# Altium PCB E-19 RGB 8x8 Display.PcbDoc
Units mil, origin at the board's own origin, x right, y up, seen from the top; angles counter-clockwise.
Board outline 1549 x 1635.81 mil, 2 copper layers (Top Layer, Bottom Layer); 28 components, 45 nets, 142 pads, 52 vias.
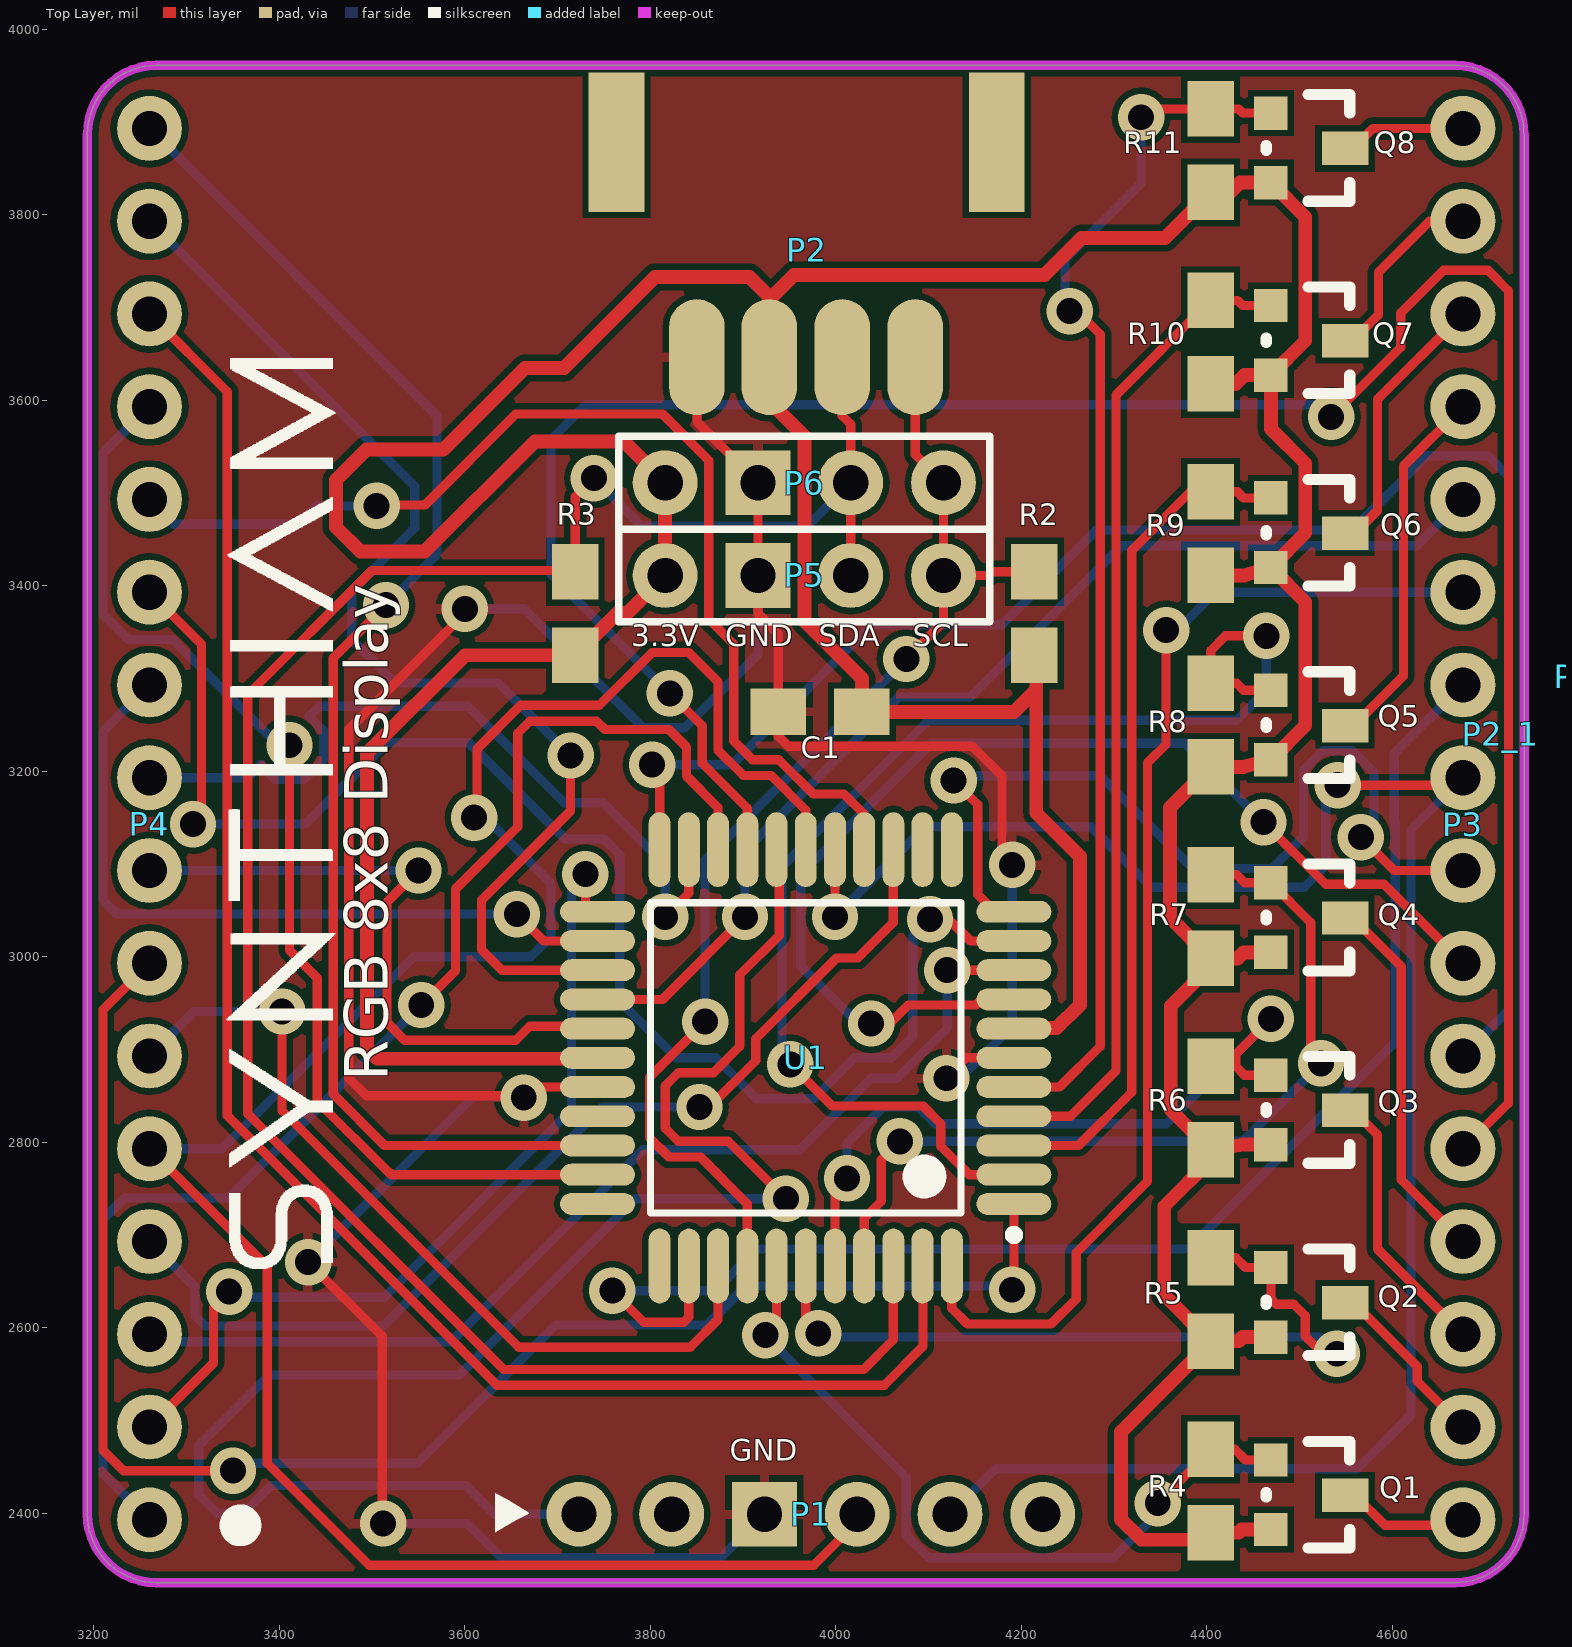
[diagram p0: Top Layer view]
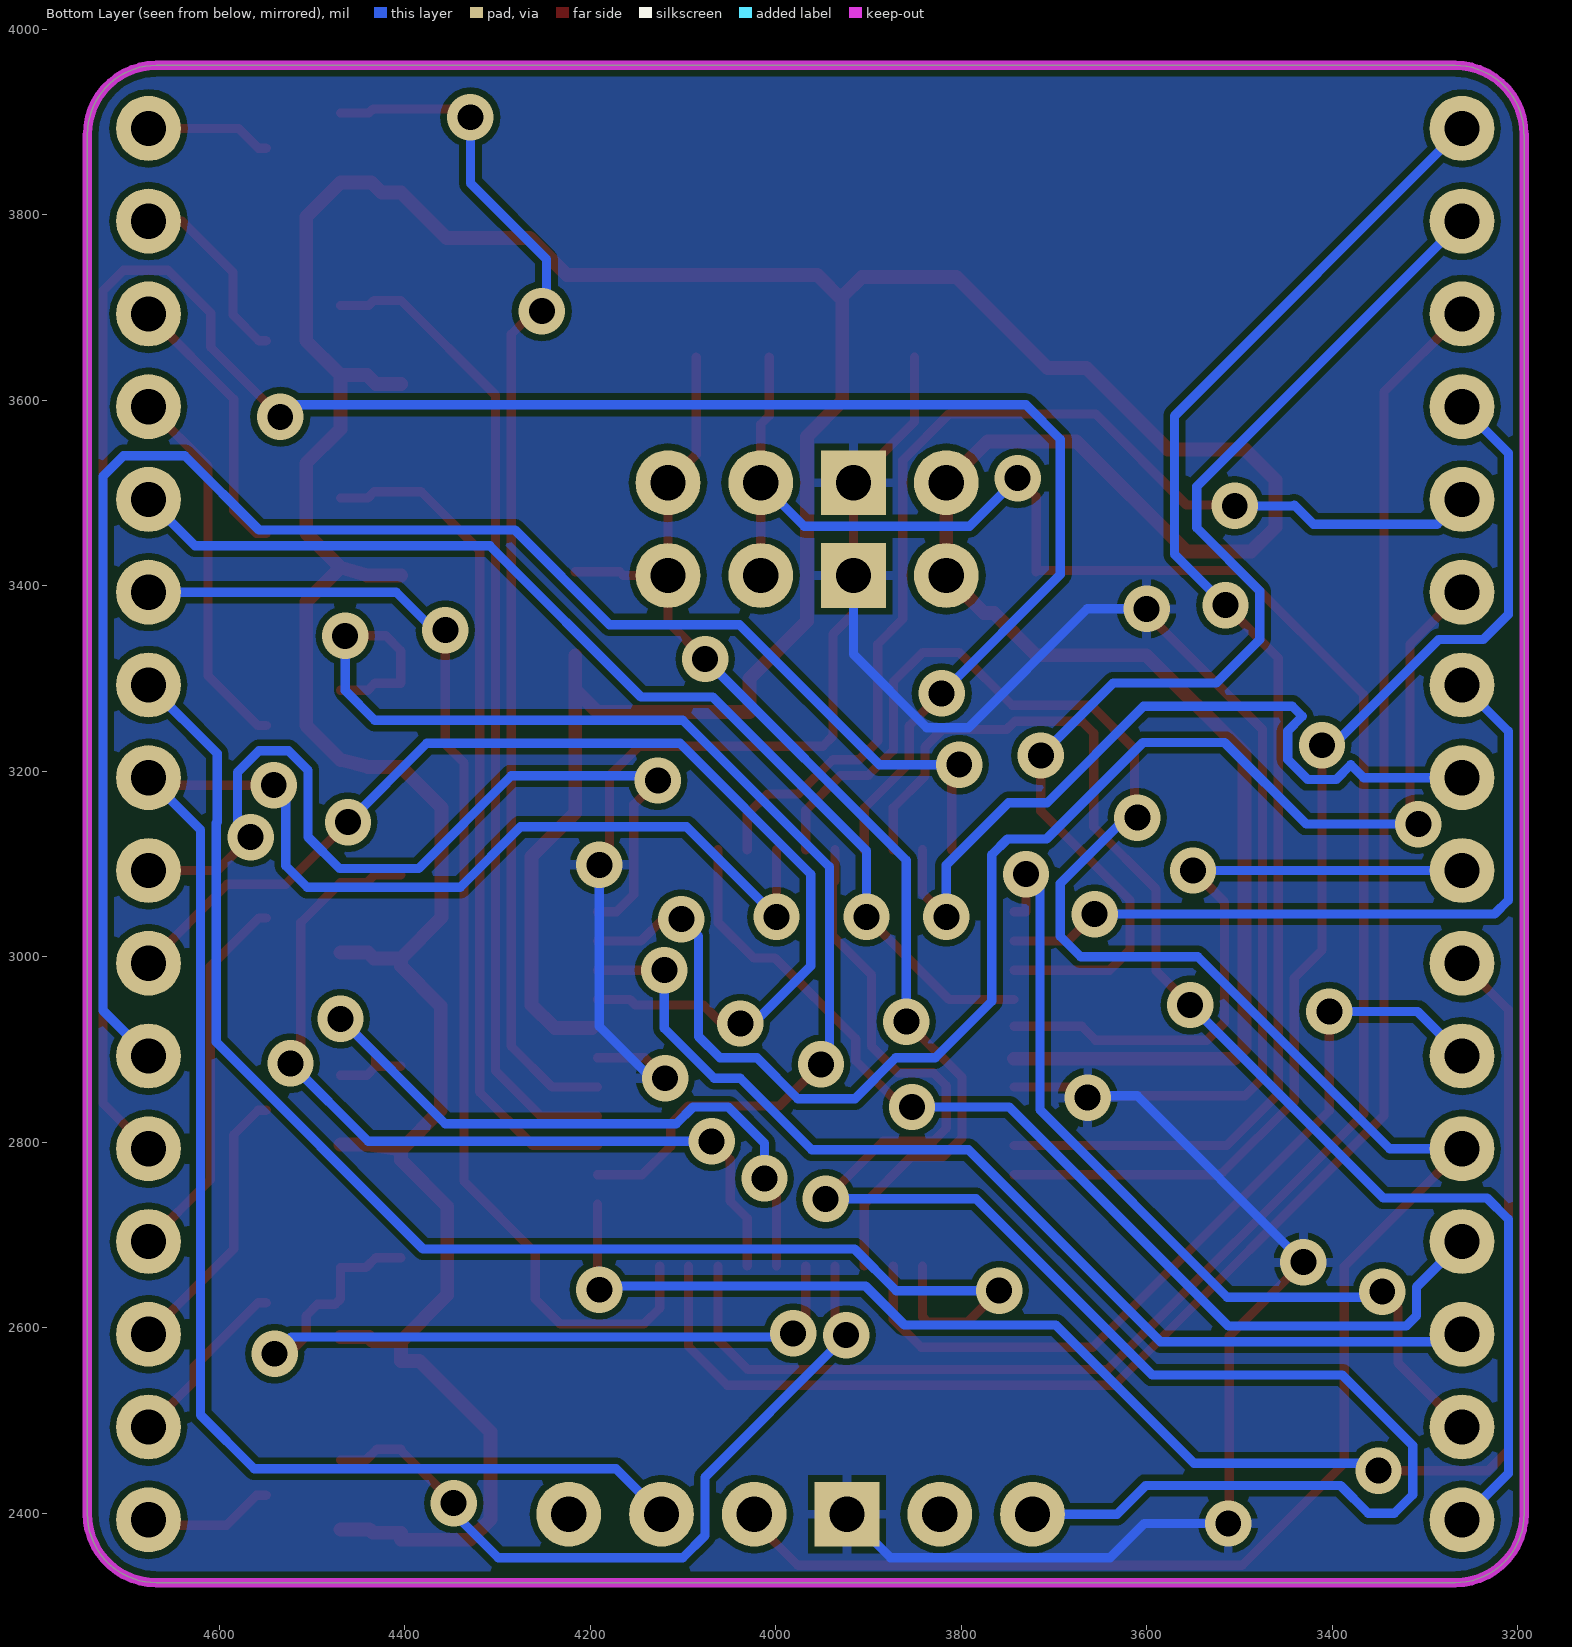
[diagram p1: Bottom Layer view, seen from below]

## Layer stack, top to bottom
Top Layer: signal copper 1.4
Dielectric: dielectric 12.6, FR-4, Dk 4.8
Bottom Layer: signal copper 1.4

## Board outline
3193,2399.5 ccw(c3267.31,2399.5) 3267.31,2325.19 4667.69,2325.19 ccw(c4667.69,2399.5) 4742,2399.5 4742,3886.69 4741.81,3886.69 ccw(c4667.5,3886.69) 4667.5,3961 3267.5,3961 ccw(c3267.5,3886.69) 3193.19,3886.69 3193,3886.69

## Design rules (kind name [scope] priority, off if disabled: settings)
Clearance [All] p1: gap=7
PolygonConnect [All] p1: connectstyle=Relief reliefconductorwidth=10 reliefentries=4 polygonreliefangle="90 Angle"
RoutingVias [All] p1: holewidth=28 width=50 viastyle="Through Hole" minholewidth=28 minwidth=50 maxholewidth=28 maxwidth=50
SilkscreenOverComponentPads [All] p1: minsilkscreentomaskgap=10
SolderMaskExpansion [All] p1: expansion=4
Width Width_1 [InNet('VCC')] p1: maxlimit=20 minlimit=10 preferedwidth=15 minimp=50.000000 maximp=50.000000 favimp=50.000000
Width [All] p2: maxlimit=10 minlimit=10 preferedwidth=10
27 further rules are at their usual default settings.

## Components (designator, comment, footprint, x,y, rotation, side; value= is the part's Value field where it differs from the comment)
C1 "Cap" "0805 TIGHT" 3983,3264 r180 top (schematic designator C3)
P1 "PROG" HDR1X6 3723,2399 r0 top
P2 "I2C" "JST-PH 4-pin SMD" 3967.5,3648 r180 top
P2_1 "Header 4" HDR1X4#1 4717,3240.5 r180 top (schematic designator P2)
P2_2 "Header 4" HDR1X4#1 4815.77,3302.36 r180 top (schematic designator P2)
P3 "Header 16" HDR1X16 4676,2393 r90 top
P4 "Header 16" HDR1X16 3260,2393 r90 top
P5 "Header 4" HDR1X4#2 4116,3411 r180 top
P6 "Header 4" HDR1X4#2 4116,3511 r180 top
Q1 "MOSFET-P" "SOT-23 P-FET" 4509,2420 r270 top
Q2 "MOSFET-P" "SOT-23 P-FET" 4509,2627.43 r270 top
Q3 "MOSFET-P" "SOT-23 P-FET" 4509,2834.86 r270 top
Q4 "MOSFET-P" "SOT-23 P-FET" 4509,3042.28 r270 top
Q5 "MOSFET-P" "SOT-23 P-FET" 4509,3249.71 r270 top
Q6 "MOSFET-P" "SOT-23 P-FET" 4509,3457.14 r270 top
Q7 "MOSFET-P" "SOT-23 P-FET" 4509,3664.57 r270 top
Q8 "AO3415" "SOT-23 P-FET" 4509,3872 r270 top
R2 "Res1" "0805 TIGHT" 4214,3370 r90 top
R3 "Res1" "0805 TIGHT" 3719,3370 r90 top
R4 "Res1" "0805 TIGHT" 4404,2424 r270 top
R5 "Res1" "0805 TIGHT" 4404,2630.43 r270 top
R6 "Res1" "0805 TIGHT" 4404,2836.86 r270 top
R7 "Res1" "0805 TIGHT" 4404,3043.29 r270 top
R8 "Res1" "0805 TIGHT" 4404,3249.71 r270 top
R9 "Res1" "0805 TIGHT" 4404,3456.14 r270 top
R10 "Res1" "0805 TIGHT" 4404,3662.57 r270 top
R11 "Res1" "0805 TIGHT" 4404,3869 r270 top
U1 "PIC16F1937 - Matrix" TQFP-PT44_M 3967.5,2891 r180 top

## Footprints (in the part's own frame and the unit in brackets; to place one, negate y for a bottom-side part, rotate by r counter-clockwise, add the part's x,y. Pads: shape width x height; smd on the part's side, far side on the other; paste and mask are expansions set on the pad)
"0805 TIGHT" [mil]
  rect 60x50 smd: 1(-45,0) 2(45,0)
HDR1X4#1 [mil] "Connector; Header; 4 Position"
HDR1X4#2 [mil] "Connector; Header; 4 Position"
  round 70 hole 38: 1(0,0) 2(100,0) 4(300,0)
  rect 70x70 hole 38: 3(200,0)
  silkscreen extent -50,-50 350,50
HDR1X6 [mil] "Connector; Header; 6 Position"
  round 70 hole 38: 1(0,0) 2(100,0) 4(300,0) 5(400,0) 6(500,0)
  rect 70x70 hole 38: 3(200,0)
HDR1X16 [mil] "Connector; Header; 16 Position"
  round 70 hole 38: 1(0,0) 2(100,0) 3(200,0) 4(300,0) 5(400,0) 6(500,0) 7(600,0) 8(700,0) 9(800,0) 10(900,0) 11(1000,0) 12(1100,0) 13(1200,0) 14(1300,0) 15(1400,0) 16(1500,0)
"JST-PH 4-pin SMD" [mil]
  rect 60x150 smd: 0(-206,-230) 0(204,-230)
  oval 60x125 smd: 1(-118.11,1.64) 2(-39.37,1.64) 3(39.37,1.64) 4(117.32,1.64)
"SOT-23 P-FET" [mil]
  rect 36x50 smd: 1(0.5,40)
  rect 36x36 smd: 2(-37.5,-40) 3(37.5,-40)
  silkscreen extent -58,-45 58,45
TQFP-PT44_M [mm] "Thin QFP, 44-Leads, Body 10x10mm, Pitch 0.8mm, IPC Low Density"
  oval 2.05x0.6 smd: 1(-5.7,4) 2(-5.7,3.2) 3(-5.7,2.4) 4(-5.7,1.6) 5(-5.7,0.8) 6(-5.7,0) 7(-5.7,-0.8) 8(-5.7,-1.6) 9(-5.7,-2.4) 10(-5.7,-3.2) 11(-5.7,-4) 23(5.7,-4) 24(5.7,-3.2) 25(5.7,-2.4) 26(5.7,-1.6) 27(5.7,-0.8) 28(5.7,0) 29(5.7,0.8) 30(5.7,1.6) 31(5.7,2.4) 32(5.7,3.2) 33(5.7,4)
  oval 0.6x2.05 smd: 12(-4,-5.7) 13(-3.2,-5.7) 14(-2.4,-5.7) 15(-1.6,-5.7) 16(-0.8,-5.7) 17(0,-5.7) 18(0.8,-5.7) 19(1.6,-5.7) 20(2.4,-5.7) 21(3.2,-5.7) 22(4,-5.7) 34(4,5.7) 35(3.2,5.7) 36(2.4,5.7) 37(1.6,5.7) 38(0.8,5.7) 39(0,5.7) 40(-0.8,5.7) 41(-1.6,5.7) 42(-2.4,5.7) 43(-3.2,5.7) 44(-4,5.7)
  silkscreen extent -5.82,-4.25 4.25,4.97, body extent -5,-5 5,5, height 1.2

## Part data
C1: "Capacitor"
P1: library part "Header 6", "Header, 6-Pin"
P2: library part "Header 4", "Header, 4-Pin"
P2_1 P2_2 P5 P6: "Header, 4-Pin"
P3 P4: "Header, 16-Pin"
Q1 Q2 Q3 Q4 Q5 Q6 Q7: "P-Channel MOSFET"
Q8: library part MOSFET-P, "P-Channel MOSFET"
R2 R3 R4 R5 R6 R7 R8 R9 R10 R11: "Resistor"

## Via types
v1: diameter 50, hole 28, Top Layer to Bottom Layer, tented both sides, 52 vias

## Nets (pads, with @x,y where several pads share a name; then routed paths per layer and width w, separated by ;. In a path a pad name is that pad's centre, name@x,y a point inside that pad or via, vN(x,y) a via of type N, cw(c..) or ccw(c..) an arc to the next point about the centre after c; other vN are vias at no path point)
17: P3.16 Q8.1 | length 135.9
  Top Layer w10: Q8.1 4557.5,3871.5 4579,3893 P3.16
18: P3.15 Q7.1 | length 207.4
  Top Layer w10: Q7.1 4557.07,3664.07 4585,3692 4585,3738 4640,3793 P3.15
19: P3.14 Q6.1 | length 295.2
  Top Layer w10: Q6.1 4559.64,3456.64 4584,3481 4584,3601 P3.14
20: P3.13 Q5.1 | length 401.8
  Top Layer w10: Q5.1 4558.21,3249.21 4612,3303 4612,3529 P3.13
29: P3.4 Q4.1 | length 406.2
  Top Layer w10: Q4.1 4557.22,3041.78 4609.54,2989.46 4609.54,2759.46 P3.4
30: P3.3 Q3.1 | length 299
  Top Layer w10: Q3.1 4557.64,2834.36 4584,2808 4584,2685 P3.3
31: P3.2 Q2.1 | length 191.8
  Top Layer w10: Q2.1 4558.07,2626.93 4626.8,2558.2 4626.8,2542.2 P3.2
32: P3.1 Q1.1 | length 142.9
  Top Layer w10: Q1.1 4559.5,2419.5 4592,2387 4670,2387 P3.1
A0: P3.5 U1.19 | length 2624.4
  Top Layer w10: v1(3821,3284) 3856,3249 3856,3208.49 3904.51,3159.99 U1.19 ; v1(4534,3582) 4609,3657 4609,3694 4655,3740 4703,3740 4725,3718 4725,2842 P3.5
  Bottom Layer w10: v1(3821,3284) 3693,3412 3693,3558 3730,3595 4521,3595 v1(4534,3582)
A1: P4.1 U1.20 | length 1443.1
  Top Layer w10: v1(3553,2948) 3590,2985 3590,3073 3657,3140 3657,3241 3670,3254 3742,3254 3751,3245 3820,3245 3839,3226 3839,3194.78 3873.01,3160.77 U1.20
  Bottom Layer w10: P4.1 3210,2443 3210,2717 3233,2740 3345,2740 v1(3553,2948)
A2: P4.9 U1.21 | length 860.5
  Top Layer w10: v1(3816,3043) 3841.52,3068.52 U1.21
  Bottom Layer w10: P4.9 3365.95,3193 3379.81,3206.86 3395.67,3191 3426.33,3191 3448,3212.67 3448,3243.33 3432.14,3259.19 3442.95,3270 3603.29,3270 3707.29,3166 3749,3166 3816,3099 v1(3816,3043)
A3: P3.6 U1.22 | length 1810.3
  Top Layer w10: v1(3802,3207) 3810.02,3198.98 U1.22
  Bottom Layer w10: v1(3802,3207) 3887.93,3207 4038.93,3358 4179,3358 4281,3460 4557,3460 4637,3540 4703,3540 4725,3518 4725,2942 P3.6
A4: P4.2 U1.23 | length 952.9
  Top Layer w10: P4.2 3329,2562 3329,2622 v1(3346,2639) ; v1(3730,3089) 3730,3048.48 U1.23
  Bottom Layer w10: v1(3346,2639) 3352,2633 3513,2633 3715,2835 3715,3078 3726,3089 v1(3730,3089)
A5: P4.10 U1.24 | length 804
  Top Layer w10: v1(3655.98,3046) 3685,3016.98 U1.24
  Bottom Layer w10: P4.10 3210,3243 3210,3061 3225,3046 v1(3655.98,3046)
A6: P4.16 U1.31 | length 1523.9
  Top Layer w10: v1(3515,3379) 3457.99,3321.99 3457.99,2852.01 3513.49,2796.51 U1.31
  Bottom Layer w10: P4.16 3570,3583 3570,3434 v1(3515,3379)
B0: P3.7 U1.8 | length 1241.7
  Top Layer w10: v1(4038,2928) 4058,2928 4078,2948 4151.01,2948 4157,2953.99 U1.8 ; v1(4461,3145) 4528,3078 4591,3078 P3.7
  Bottom Layer w10: v1(4038,2928) 4031,2921 3962,2990 3962,3089 4103,3230 4376,3230 v1(4461,3145)
B1: P4.3 U1.9 | length 1137.7
  Top Layer w10: v1(4120,2985.49) U1.9
  Bottom Layer w10: P4.3 3268,2585 3585,2585 3792,2792 3961,2792 4038,2869 4066,2869 4120,2923 v1(4120,2985.49)
B2: P4.11 U1.10 | length 1603.1
  Top Layer w10: P4.11 3316,3337 3316,3152 v1(3307,3143) ; v1(4101.5,3040.5) 4121.5,3040.5 4145.02,3016.98 U1.10
  Bottom Layer w10: v1(3307,3143) 3428,3143 3516,3231 3604,3231 3708,3127 3750,3127 3767,3110 3767,2952 3828,2891 3870.5,2891 3914.5,2847 3976,2847 4020,2891 4060,2891 4083,2914 4083,3022 v1(4101.5,3040.5)
B3: P3.8 U1.11 | length 982.7
  Top Layer w10: v1(4127,3190) 4153,3164 4153,3067 4171.52,3048.48 U1.11 ; v1(4566,3129) 4602,3093 P3.8
  Bottom Layer w10: v1(4127,3190) 4132,3195 4285,3195 4385,3095 4470,3095 4504,3129 4504,3201 4525,3222 4557,3222 4580,3199 4580,3145 4565,3130 v1(4566,3129)
B4: P4.4 U1.14 | length 1130.2
  Top Layer w10: v1(3853,2838) 3863.5,2838 3913.5,2888 3913.5,2911.5 4000.56,2998.56 4023.56,2998.56 4061.99,3036.99 U1.14
  Bottom Layer w10: P4.4 3309,2644 3309,2613 3320,2602 3512,2602 3748,2838 v1(3853,2838)
B5: P4.12 U1.15 | length 1219.4
  Top Layer w10: v1@3505,3487 3557,3487 3655,3585 3800,3585 ; 3790,3585 3813,3585 3863,3535 3863,3364 3890,3337 3890,3232.5 3910.01,3212.49 3938.51,3212.49 3975.49,3175.51 4008.49,3175.51 4030.49,3153.51 U1.15
  Bottom Layer w10: P4.12 3286.79,3466.21 3420.21,3466.21 3441,3487 3442,3486 v1(3505,3486)
C0: P4.13 U1.32 | length 1235.2
  Top Layer w10: v1(3411,3228) 3411,3007 3440.99,2977.01 3440.99,2844.34 3518.33,2767 3518.96,2767 3520.94,2765.02 U1.32
  Bottom Layer w10: P4.13 3210,3543 3210,3369 3237,3342 3285,3342 3399,3228 v1(3411,3228)
C1: P3.10 U1.35 | length 1525
  Top Layer w10: v1(3759,2640) 3793,2606 3836,2606 3841.52,2611.52 U1.35
  Bottom Layer w10: v1(3759,2640) 3870,2640 3915,2685 4380,2685 4603,2908 4603,3144.33 4602,3145.33 4602,3219 P3.10
C2: P4.6 U1.36 | length 915.5
  Top Layer w10: v1(3403,2941) 3403,2834 3658,2579 3746,2579 3843,2579 3873.01,2609.01 U1.36
  Bottom Layer w10: P4.6 3308,2941 v1(3403,2941)
C5: P4.14 U1.43 | length 1873.5
  Top Layer w10: P4.14 3344,3609 3344,2828.75 3634.75,2538 3722.75,2538 4052,2538 4094,2580 U1.43@4094,2666.59
C6: P3.11 U1.44 | length 1296
  Top Layer w10: U1.44 4124.98,2621.02 4142,2604 4232,2604 4259,2631 4259,2681 4336,2758 4336,3209.08 4356,3229.08 v1(4356,3352)
  Bottom Layer w10: v1(4356,3352) 4368,3352 4409,3393 P3.11
C7: P4.7 U1.1 | length 1737.3
  Top Layer w10: P4.7 3210,2943 3210,2468 3232,2446 v1(3350,2446) ; v1(4190,2641) 4192,2643 4192,2733.52 U1.1
  Bottom Layer w10: v1(3350,2446) 3358,2454 3549,2454 3698,2603 3861,2603 3903,2645 4174,2645 4190,2661 v1(4190,2641)
D0: Q1.2 R4.1 U1.38 | length 841.5
  Top Layer w10: v1(3924,2592) 3928,2588 3930,2588 3936,2594 U1.38 ; v1(4347,2411) 4404,2468 R4.1 4430,2469 4441.5,2457.5 Q1.2
  Bottom Layer w10: v1(3924,2592) 3928,2588 3928,2586 3923,2581 3934,2581 4076,2439 4076,2376 4100,2352 4299,2352 4347,2400 v1(4347,2411)
D1: Q2.2 R5.1 U1.39 | length 860.4
  Top Layer w10: U1.39 3967.5,2607.5 v1(3981,2594) ; R5.1 4431,2675.43 4441.5,2664.93 Q2.2 4469,2631 4474.75,2625.25 4493.75,2625.25 4506,2613 4506,2591 4525,2572 v1(4540,2572)
  Bottom Layer w10: v1@3981,2580 3991,2590 4522,2590 v1(4540,2572)
D2: Q3.2 R6.1 U1.40 | length 801
  Top Layer w10: U1.40 3999,2748 v1(4012,2761) ; R6.1 4431,2881.86 ; Q3.2 4440.5,2872.36 4431,2881.86 ; v1(4469,2933) 4431,2895 4431,2881.86
  Bottom Layer w10: v1(4012,2761) 4012,2799 4051,2838 4089,2838 4107,2820 4356,2820 v1(4469,2933)
D3: Q4.2 R7.1 U1.41 | length 924.8
  Top Layer w10: U1.41 4030.49,2718 4049,2736.51 4049,2781 v1(4069,2801) ; R7.1 4432,3088.29 4440.5,3079.78 Q4.2 4512,3036.78 4512,2896 v1(4523,2885)
  Bottom Layer w10: v1(4069,2801) 4439,2801 v1(4523,2885)
D4: Q5.2 R8.1 U1.2 | length 1350.7
  Top Layer w10: v1(3951,2884) 3996,2839 4094,2839 4113.17,2819.83 4113.17,2795.83 4143.98,2765.02 U1.2 ; v1(4464,3346) 4420,3346 4404,3330 R8.1 4432,3294.71 4439.5,3287.21 Q5.2
  Bottom Layer w10: v1(3951,2884) 3942,2893 3942,3097 4100,3255 4432,3255 4464,3287 v1(4464,3346)
D5: Q6.2 R9.1 U1.3 | length 913.7
  Top Layer w10: U1.3 4261.51,2796.51 4319,2854 4319,3438 4382.14,3501.14 R9.1 4433,3501.14 4439.5,3494.64 Q6.2
D6: Q7.2 R10.1 U1.4 | length 1070.5
  Top Layer w10: U1.4 4253.01,2828.01 4302,2877 4302,3605.57 R10.1 4433,3707.57 4438.5,3702.07 Q7.2
D7: Q8.2 R11.1 U1.5 | length 1326
  Top Layer w10: U1.5 4241,2859.5 4285,2903.5 4285,3671 v1@4247,3709 ; v1@4327,3903 v1(4329,3905) 4338,3914 R11.1 4434,3914 4438.5,3909.5 Q8.2
  Bottom Layer w10: v1(4252,3696) 4247,3701 4247,3752 4329,3834 v1(4329,3905)
E0: P4.15 U1.25 | length 1274.9
  Top Layer w10: v1(3714,3217) 3714,3157 3618,3061 3618,3007.49 3640,2985.49 U1.25
  Bottom Layer w10: P4.15 3546,3507 3546,3462.33 3478,3394.33 3478,3342 3525,3295 3636,3295 v1(3714,3217) v1@3707.94,3217
E1: P3.12 U1.26 | length 1197.9
  Top Layer w10: U1.26 3812.99,2953.99 v1(3902,3043)
  Bottom Layer w10: v1(3902,3043) 3902,3114.23 4067.77,3280 4145,3280 4308,3443 4626,3443 P3.12
E2: P4.8 U1.27 | length 709.3
  Top Layer w10: v1(3550,3093) 3516,3059 3516,2929 3535,2910 3655,2910 3670,2925 U1.27@3743.09,2925
  Bottom Layer w10: P4.8 v1(3550,3093)
GND: C1.2 P1.3 P2.4 P5.3 P6.3 U1.6 U1.29 | length 3549.6
  Top Layer w10: v1(3431,2670.75) 3511,2590.75 3511,2390 v1(3512,2389) ; v1@3590.5,3360.5 3474.99,3244.99 3474.99,2868.89 3493.88,2850 v1@3675,2850 ; v1(3663.5,2848) 3675,2859.5 U1.29 ; P2.4 3850.18,3576.82 P6.3 P5.3 3916,3370 3938,3348 C1.2 3938,3238 3949,3227 4147,3227 4179,3195 4179,3101 v1@4190,3090 ; v1(4119,2869) 4141,2891 U1.6
  Bottom Layer w10: v1(3431,2670.75) 3610.25,2850 v1@3663.5,2850 ; v1(3512,2389) 3602.58,2389 3639.58,2352 3876,2352 P1.3 ; v1(3600,3375) 3664,3375 3792,3247 3837,3247 3916,3326 P5.3 ; v1(4119,2869) 4134,2869 4190,2925 v1(4190,3099)
PGC_B6: P1.5 P3.9 U1.16 | length 2165.5
  Top Layer w10: v1(3999,3043) U1.16 ; v1(4541,3185) 4676,3185 P3.9
  Bottom Layer w10: v1(3999,3043) 4096,3140 4275,3140 4340,3075 4505,3075 4528,3098 4528,3173 4540,3185 v1(4541,3185) ; P1.5 4172,2448 4562,2448 4620,2506 4620,3137 P3.9
PGD_B7: P1.4 P4.5 U1.17 | length 2409.5
  Top Layer w10: P4.5 3387,2666 3387,2454 3497,2344 3976,2344 P1.4@4023,2391 ; v1@3613,3159 3613,3224 3660,3271 3745,3271 3802,3328 3841.38,3328 3873,3296.38 3873,3222.49 3900,3195.49 3930.01,3195.49 3967.5,3158 U1.17
  Bottom Layer w10: P4.5 3338,2793 3545,3000 3671,3000 3693,3022 3693,3079 v1@3613,3159
  other v1: 3610,3150
RST_E3: P1.1 U1.18 | length 1777.8
  Top Layer w10: U1.18 3936,3082 3939,3082 3939,3023 3896.5,2980.5 3896.5,2903.5 3868,2875 3830,2875 3816,2861 3816,2815 3830,2801 3884,2801 v1(3946,2739)
  Bottom Layer w10: P1.1 3632,2399 3601,2430 3391,2430 3361,2400 3333,2400 3313,2420 3313,2473 3389,2549 3594,2549 3784,2739 v1(3946,2739)
SCL: P2.1 P5.1 P6.1 R2.2 U1.37 | length 1288.9
  Top Layer w10: v1(3859,2930) 3799,2870 3799,2805 3820,2784 3854,2784 3904.51,2733.49 U1.37 ; v1(4076,3321) 4116,3361 P5.1 ; P2.1 4085.61,3541.39 P6.1 P5.1 ; R2.2@4216,3415 4168,3415 4164,3411 P5.1
  Bottom Layer w10: v1(3859,2930) 3859,3104 v1(4076,3321)
SDA: P2.2 P5.2 P6.2 R3.2 U1.42 | length 2429.7
  Top Layer w10: R3.2 3719,3448 3719,3496 v1(3739,3516) ; R3.2@3719,3416.44 3500,3416.44 3366,3282.44 3366,2830.79 3641.79,2555 3729.79,2555 4030,2555 4061.99,2586.99 U1.42 ; P2.2 4006.87,3583.13 4016,3574 P6.2 P5.2
  Bottom Layer w10: v1(3739,3516) 3791,3464 3969,3464 P6.2
VCC: C1.1 P2.3 P5.4 P6.4 Q1.3 Q2.3 Q3.3 Q4.3 Q5.3 Q6.3 Q7.3 Q8.3 R2.1 R3.1 R4.2 R5.2 R6.2 R7.2 R8.2 R9.2 R10.2 R11.2 U1.7 U1.28 | length 6146.8
  Top Layer w15: U1.28@3743.09,2890 3506,2890 3494.49,2901.51 3494.49,3219.49 3600,3325 R3.1 3764.49,3370.49 3775.49,3370.49 P5.4 P6.4 3771.5,3555.5 3675.5,3555.5 3556.75,3436.75 3487.25,3436.75 3461,3463 3461,3514 3493.75,3546.75 3576.75,3546.75 3664.75,3634.75 3706.75,3634.75 3805,3733 3907,3733 3928.13,3711.87 P2.3@3928.13,3708.13 ; U1.7@4198,2923 4238,2923 4263,2948 4263,3108 4216,3155 4216,3288 ; R2.1@4216,3325 4216,3288 ; R9.2 4440.5,3411.14 Q6.3 ; R10.2 4431,3617.57 4440.5,3627.07 Q7.3 ; Q1.3 4437.5,2382.5 4434,2379 R4.2 4404,2371.5 4329.5,2371.5 4307.5,2393.5 4307.5,2487.5 4384,2564 4404,2564 R5.2 ; Q2.3 4438.5,2589.93 4434,2585.43 R5.2 ; Q3.3 4438.5,2797.36 R6.2 ; Q4.3 4439.5,3004.78 4433,2998.29 R7.2 ; P2.3@3928.13,3708.13 P2.3 3928.13,3598.87 3966,3561 3966,3362 4028,3300 C1.1 4192,3264 4216,3288 ; P2.3@3928.13,3708.13 3955,3735 4225,3735 4265,3775 4355,3775 R11.2 4425,3824 4435.5,3834.5 Q8.3 4506,3797.5 4506,3664.07 Q7.3 ; R5.2 4354,2635.43 4354,2731 4404,2781 R6.2 ; R6.2 4361,2834.86 4361,2947 4404,2990 R7.2 ; R7.2 4360,3042.29 4360,3160.71 R8.2 4439.5,3204.71 Q5.3 4506,3249.21 4506,3382.64 Q6.3 ; Q6.3 4506,3456.64 4506,3532 4469,3569 Q7.3
pads on no net: P1.2 P1.6 P2.0 U1.12 U1.13 U1.30 U1.33 U1.34

## Polygon pours and split planes (outlines as drawn)
GND on Bottom Layer "FillGnd6" (solid, pour order 2): 3193,2399.5 ccw(c3267.31,2399.5) 3267.31,2325.19 4667.69,2325.19 ccw(c4667.69,2399.5) 4742,2399.5 4742,3886.69 4741.81,3886.69 ccw(c4667.5,3886.69) 4667.5,3961 3267.5,3961 ccw(c3267.5,3886.69) 3193.19,3886.69 3193,3886.69
GND on Top Layer "FillGnd5" (solid, pour order 4): 3193,2399.5 ccw(c3267.31,2399.5) 3267.31,2325.19 4667.69,2325.19 ccw(c4667.69,2399.5) 4742,2399.5 4742,3886.69 4741.81,3886.69 ccw(c4667.5,3886.69) 4667.5,3961 3267.5,3961 ccw(c3267.5,3886.69) 3193.19,3886.69 3193,3886.69

## Keep-outs
Keep-Out Layer:
  lines w10: 3193,3886.69 3193,2399.5 ccw(c3267.31,2399.5) 3267.31,2325.19 4667.69,2325.19 ccw(c4667.69,2399.5) 4742,2399.5 4742,3886.69 ; 3193.19,3886.69 cw(c3267.5,3886.69) 3267.5,3961 4667.5,3961 cw(c4667.5,3886.69) 4741.81,3886.69

## Silkscreen, mask and mechanical layers (free items; w line width, h text height)
Top Overlay:
  drawing of 2262 lines, arcs and shapes, not listed
  text "3.3V" at 3779.53,3326.77 h40
  text "GND" at 3880.58,3326.77 h40
  text "SDA" at 3981.63,3326.77 h40
  text "SCL" at 4082.68,3326.77 h40
  text "RGB 8x8 Display" at 3532.25,2865.87 h80 r90
  text "GND" at 3885.83,2448.82 h40
Bottom Solder:
  text ":)" at 4493,2428 h150 r270